# Altium PCB MainBoard.PcbDoc
Units mil, origin at the board's own origin, x right, y up, seen from the top; angles counter-clockwise.
Board outline 1003.94 x 925.2 mil, 2 copper layers (Top1, Bottom4), stack 46.457 mil thick; 29 components, 50 nets, 200 pads, 124 vias.
Unrouted connection lines stored in the file: 28.
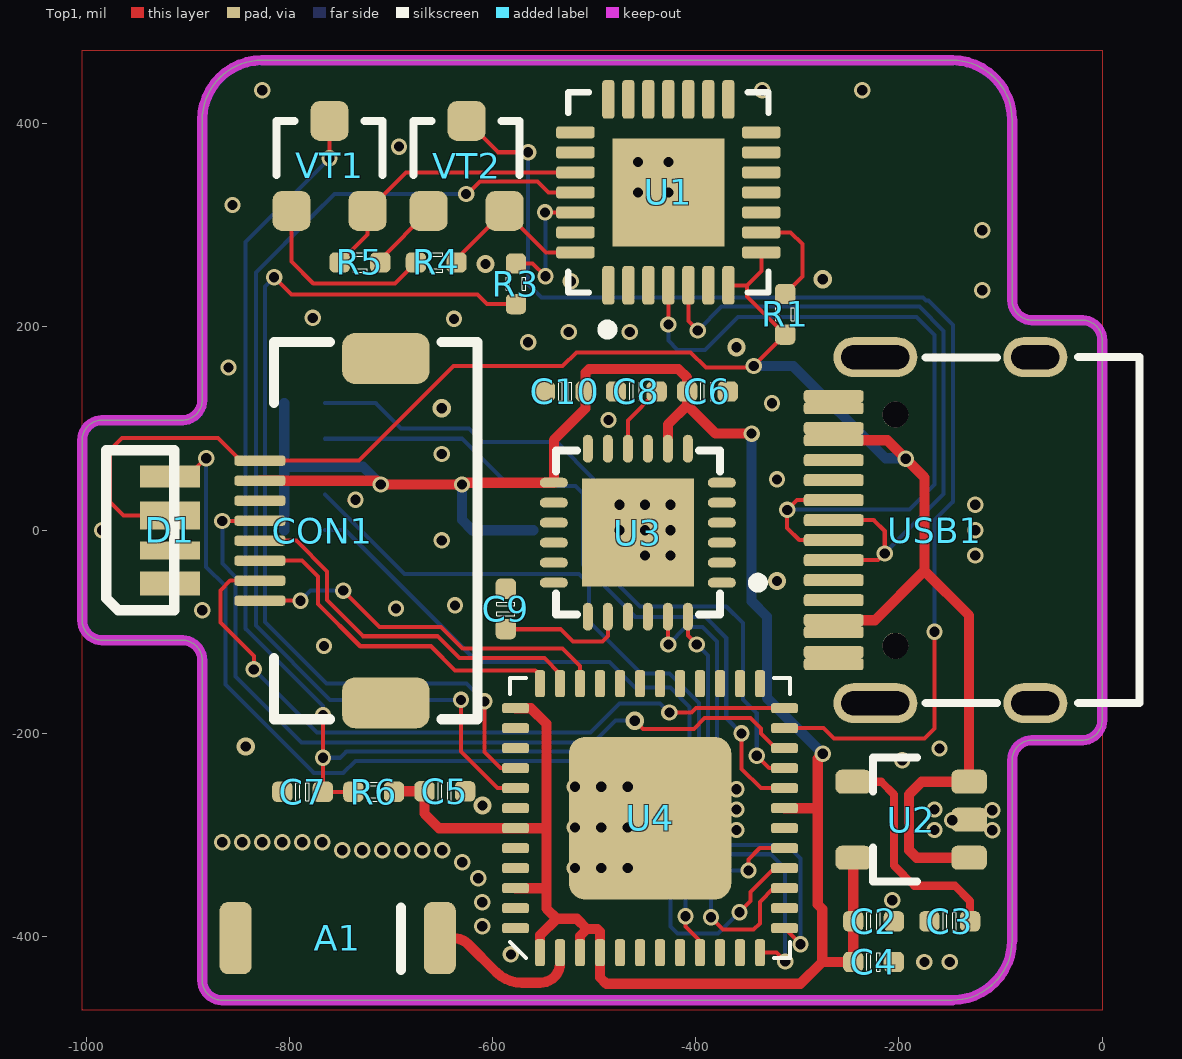
[diagram p0: Top1 view]
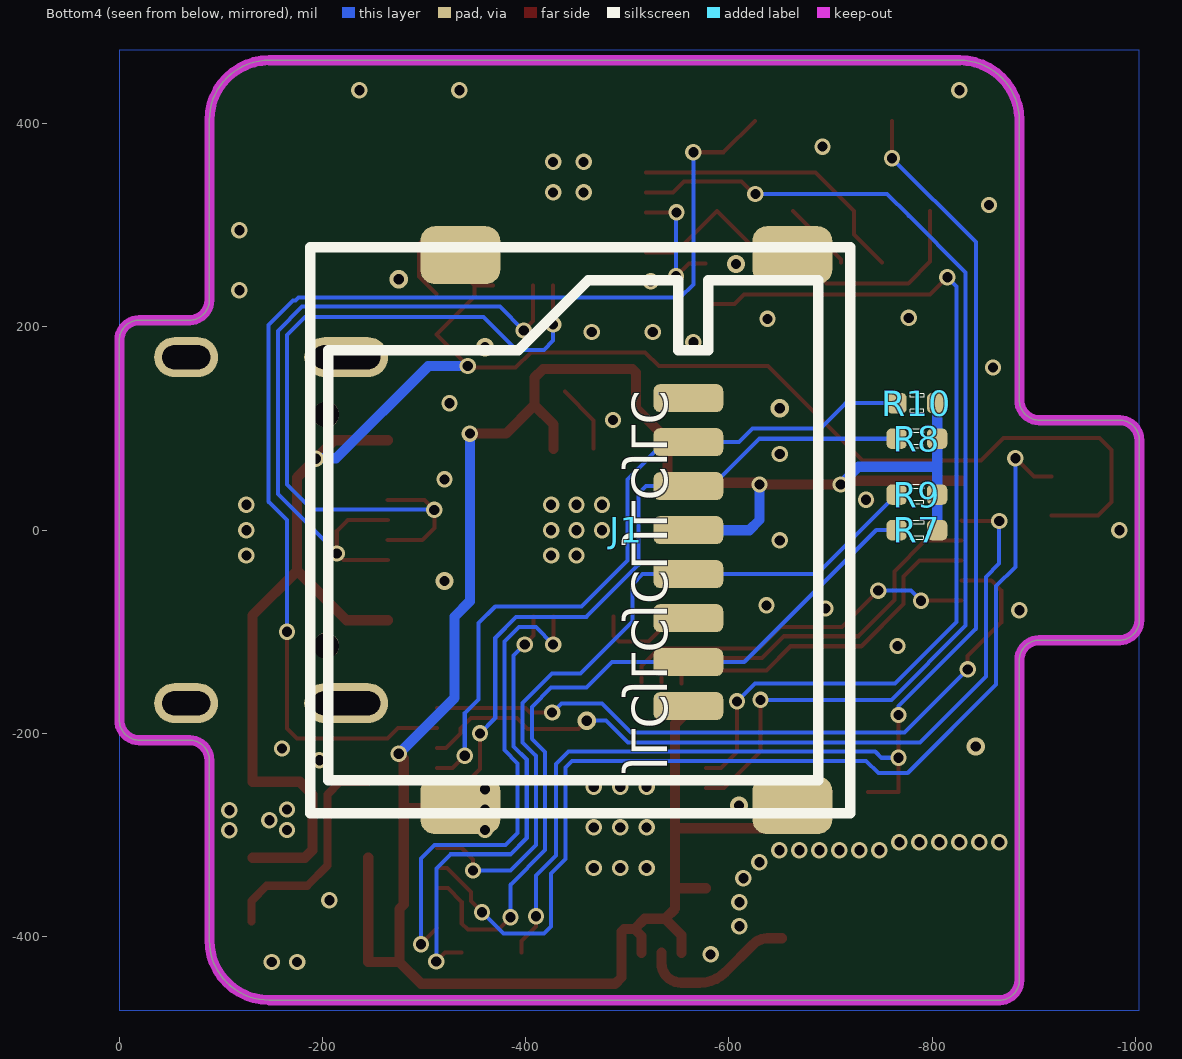
[diagram p1: Bottom4 view, seen from below]

## Layer stack, top to bottom
Top Solder: solder mask 0.3937, Solder Resist, Dk 3.5
Top1: signal copper 1.5748
Dielectric 2: core 43.3071, PP-006, Dk 4.2
Bottom4: signal copper 1.5748
Bottom Solder: solder mask 0.3937, Solder Resist, Dk 3.5

## Board outline
-905.51,-108.27 cw(c-905.51,-127.95) -885.83,-127.95 -885.83,-442.91 ccw(c-866.14,-442.91) -866.14,-462.6 -147.64,-462.6 ccw(c-147.64,-403.54) -88.58,-403.54 -88.58,-226.38 cw(c-68.9,-226.38) -68.9,-206.69 -19.68,-206.69 ccw(c-19.68,-187.01) 0,-187.01 0,187.01 ccw(c-19.68,187.01) -19.68,206.69 -68.9,206.69 cw(c-68.9,226.38) -88.58,226.38 -88.58,403.54 ccw(c-147.64,403.54) -147.64,462.6 -826.77,462.6 ccw(c-826.77,403.54) -885.83,403.54 -885.83,127.95 cw(c-905.51,127.95) -905.51,108.27 -984.25,108.27 ccw(c-984.25,88.58) -1003.94,88.58 -1003.94,-88.58 ccw(c-984.25,-88.58) -984.25,-108.27

## Design rules (kind name [scope] priority, off if disabled: settings)
AssemblyTestPointUsage [All] p0: scope1count=1 scope1_0_kind=Board scope1_0_value=Board scope2count=1 scope2_0_kind=Board scope2_0_value=Board commentlength=0
AssemblyTestpoint [All] p0: scope1count=1 scope1_0_kind=Board scope1_0_value=Board scope2count=1 scope2_0_kind=Board scope2_0_value=Board commentlength=0
Clearance [All] p0: scope1count=1 scope1_0_kind=Board scope1_0_value=Board scope2count=1 scope2_0_kind=Board scope2_0_value=Board commentlength=0 gap=5
Clearance [All] p1: gap=5 ignorepadtopadclearanceinfootprint=FALSE
ComponentClearance [All] p0: scope1count=1 scope1_0_kind=Board scope1_0_value=Board scope2count=1 scope2_0_kind=Board scope2_0_value=Board commentlength=0 gap=0 collisioncheckmode=3
ComponentClearance [All] p1: gap=0 collisioncheckmode=3 verticalgap=0 showdistances=FALSE
DiffPairsRouting [All] p0: scope1count=1 scope1_0_kind=Board scope1_0_value=Board scope2count=1 scope2_0_kind=Board scope2_0_value=Board commentlength=0
DiffPairsRouting [All] p1: maxlimit=9 minlimit=9 mostfreqgap=9 toplayer_minwidth=4 toplayer_maxwidth=4 toplayer_prefwidth=4 bottomlayer_minwidth=4 bottomlayer_maxwidth=4 bottomlayer_prefwidth=4 maxuncoupledlength=500
FabricationTestPointUsage [All] p0: scope1count=1 scope1_0_kind=Board scope1_0_value=Board scope2count=1 scope2_0_kind=Board scope2_0_value=Board commentlength=0 valid=0 allowmultiple=FALSE
FabricationTestpoint [All] p0: scope1count=1 scope1_0_kind=Board scope1_0_value=Board scope2count=1 scope2_0_kind=Board scope2_0_value=Board commentlength=0 side=3 testpointundercomponent=TRUE minsize=40 maxsize=100 preferedsize=60 minholesize=0 maxholesize=40 preferedholesize=32 testpointgrid=1
FanoutControl Fanout_BGA [All] p0: scope1count=1 scope1_0_kind=Board scope1_0_value=Board scope2count=1 scope2_0_kind=Board scope2_0_value=Board commentlength=26 // Fanout_BGA (Default Rule)
FanoutControl Fanout_LCC [All] p0 off: scope1count=1 scope1_0_kind=Board scope1_0_value=Board scope2count=1 scope2_0_kind=Board scope2_0_value=Board commentlength=69 // Protel DXP Scope 1 Expression Was: IsLCC   Fanout_LCC (Default Rule)
FanoutControl Fanout_SOIC [All] p0 off: scope1count=1 scope1_0_kind=Board scope1_0_value=Board scope2count=1 scope2_0_kind=Board scope2_0_value=Board commentlength=71 // Protel DXP Scope 1 Expression Was: IsSOIC   Fanout_SOIC (Default Rule)
FanoutControl Fanout_Small [All] p0 off: scope1count=1 scope1_0_kind=Board scope1_0_value=Board scope2count=1 scope2_0_kind=Board scope2_0_value=Board commentlength=84 // Protel DXP Scope 1 Expression Was: (CompPinCount < 5)   Fanout_Small (Default Rule)
FanoutControl Fanout_Default [All] p0: scope1count=1 scope1_0_kind=Board scope1_0_value=Board scope2count=1 scope2_0_kind=Board scope2_0_value=Board commentlength=30 // Fanout_Default (Default Rule)
FanoutControl Fanout_BGA [All] p1: bgadir=Out bgaviamode=Centered fanoutstyle=Auto fanoutdirection=Alternating viagrid=1 // Fanout_BGA (Default Rule)
Height [All] p0: scope1count=1 scope1_0_kind=Board scope1_0_value=Board scope2count=1 scope2_0_kind=Board scope2_0_value=Board commentlength=0
HoleSize [All] p0: scope1count=1 scope1_0_kind=Board scope1_0_value=Board scope2count=1 scope2_0_kind=Board scope2_0_value=Board commentlength=0 absolutevalues=TRUE maxlimit=10000 minlimit=8 maxpercent=80.000 minpercent=20.000
HoleSize [All] p1: absolutevalues=TRUE maxlimit=10000 minlimit=8 maxpercent=80.000 minpercent=20.000
HoleToHoleClearance [All] p0: scope1count=1 scope1_0_kind=Board scope1_0_value=Board scope2count=1 scope2_0_kind=Board scope2_0_value=Board commentlength=0
LayerPairs [All] p0: scope1count=1 scope1_0_kind=Board scope1_0_value=Board scope2count=1 scope2_0_kind=Board scope2_0_value=Board commentlength=0 enforce=TRUE
MinimumSolderMaskSliver [All] p0 off: scope1count=1 scope1_0_kind=Board scope1_0_value=Board scope2count=1 scope2_0_kind=Board scope2_0_value=Board commentlength=0
MinimumSolderMaskSliver [All] p1 off: minsoldermaskwidth=2
NetAntennae [All] p0: scope1count=1 scope1_0_kind=Board scope1_0_value=Board scope2count=1 scope2_0_kind=Board scope2_0_value=Board commentlength=0
PasteMaskExpansion [All] p0: scope1count=1 scope1_0_kind=Board scope1_0_value=Board scope2count=1 scope2_0_kind=Board scope2_0_value=Board commentlength=0 expansion=0
PlaneClearance [All] p0: scope1count=1 scope1_0_kind=Board scope1_0_value=Board scope2count=1 scope2_0_kind=Board scope2_0_value=Board commentlength=0 clearance=8
PlaneClearance [All] p1: clearance=8
PlaneConnect [All] p0: scope1count=1 scope1_0_kind=Board scope1_0_value=Board scope2count=1 scope2_0_kind=Board scope2_0_value=Board commentlength=0 planeconnectstyle=Direct reliefexpansion=20 reliefentries=4 reliefconductorwidth=10 reliefairgap=10
PlaneConnect [All] p1: planeconnectstyle=Direct reliefexpansion=20 reliefentries=4 reliefconductorwidth=10 reliefairgap=10
PolygonConnect [All] p0: scope1count=1 scope1_0_kind=Board scope1_0_value=Board scope2count=1 scope2_0_kind=Board scope2_0_value=Board commentlength=0 connectstyle=Direct reliefconductorwidth=10 reliefentries=4 polygonreliefangle="90 Angle"
PolygonConnect [All] p1: connectstyle=Direct reliefconductorwidth=10 reliefentries=4 polygonreliefangle="90 Angle" airgapwidth=10
RoutingCorners [All] p0: scope1count=1 scope1_0_kind=Board scope1_0_value=Board scope2count=1 scope2_0_kind=Board scope2_0_value=Board commentlength=0 cornerstyle=45-Degree minsetback=100 maxsetback=100
RoutingLayers [All] p0: scope1count=1 scope1_0_kind=Board scope1_0_value=Board scope2count=1 scope2_0_kind=Board scope2_0_value=Board commentlength=0 top layer=Automatic bottom layer=Automatic
RoutingPriority [All] p0: scope1count=1 scope1_0_kind=Board scope1_0_value=Board scope2count=1 scope2_0_kind=Board scope2_0_value=Board commentlength=0
RoutingTopology [All] p0: scope1count=1 scope1_0_kind=Board scope1_0_value=Board scope2count=1 scope2_0_kind=Board scope2_0_value=Board commentlength=0 topology=Shortest
RoutingVias [All] p0: scope1count=1 scope1_0_kind=Board scope1_0_value=Board scope2count=1 scope2_0_kind=Board scope2_0_value=Board commentlength=0 holewidth=8 width=16 viastyle="Through Hole" minholewidth=6 minwidth=12 maxholewidth=28 maxwidth=50
RoutingVias [All] p1: holewidth=8 width=16 viastyle="Through Hole" minholewidth=6 minwidth=12 maxholewidth=28 maxwidth=50
ShortCircuit [All] p0: scope1count=1 scope1_0_kind=Board scope1_0_value=Board scope2count=1 scope2_0_kind=Board scope2_0_value=Board commentlength=0 allowed=FALSE
SilkToBoardRegionClearance [All] p0 off: scope1count=1 scope1_0_kind=Board scope1_0_value=Board scope2count=1 scope2_0_kind=Board scope2_0_value=Board commentlength=0
SilkToBoardRegionClearance [All] p1 off:
SilkToSilkClearance [All] p0: scope1count=1 scope1_0_kind=Board scope1_0_value=Board scope2count=1 scope2_0_kind=Board scope2_0_value=Board commentlength=0
SilkToSilkClearance [All] p1: silktosilkclearance=0
SilkToSolderMaskClearance [All] p0 off: scope1count=1 scope1_0_kind=Board scope1_0_value=Board scope2count=1 scope2_0_kind=Board scope2_0_value=Board commentlength=44 // Protel DXP Scope 1 Expression Was: IsPad
SilkToSolderMaskClearance [IsPad] p1: minsilkscreentomaskgap=0 clearancetoexposedcopper=TRUE
SolderMaskExpansion [All] p0: scope1count=1 scope1_0_kind=Board scope1_0_value=Board scope2count=1 scope2_0_kind=Board scope2_0_value=Board commentlength=0 expansion=3
SolderMaskExpansion [All] p1: expansion=3 istentingtop=FALSE
UnRoutedNet [All] p0: scope1count=1 scope1_0_kind=Board scope1_0_value=Board scope2count=1 scope2_0_kind=Board scope2_0_value=Board commentlength=0
UnpouredPolygon [All] p0: scope1count=1 scope1_0_kind=Board scope1_0_value=Board scope2count=1 scope2_0_kind=Board scope2_0_value=Board commentlength=0
Width [All] p0: scope1count=1 scope1_0_kind=Board scope1_0_value=Board scope2count=1 scope2_0_kind=Board scope2_0_value=Board commentlength=0 maxlimit=10000 minlimit=4 preferedwidth=4
Width [All] p1: maxlimit=10000 minlimit=4 preferedwidth=4
20 further rules are at their usual default settings.

## Components (designator, comment, footprint, x,y, rotation, side; value= is the part's Value field where it differs from the comment)
A1 "" ANT-Rainsun-AN5120 -751.97,-401.57 r180 top
C2 "10uF" CAP_0402 -225,-385 r180 top
C3 "10nF" CAP_0402 -150,-385 r0 top
C4 "10uF" CAP_0402 -225,-425 r180 top
C5 "0.1uF" CAP_0402 -647,-257 r180 top
C6 "10nF" CAP_0402 -388.5,136.5 r0 top
C7 "0.1uF" CAP_0402 -787,-257.5 r180 top
C8 "0.1uF" CAP_0402 -458.5,136.5 r180 top
C9 "2.2nF" CAP_0402 -587,-77.5 r270 top
C10 "0.1uF" CAP_0402 -528.5,136.5 r0 top
CON1 "FFC_0.5_8" FFC_0.5_8 -740,-0.5 r90 top
D1 "RGB" LED_WS2812_CE -925.2,0 r270 top
J1 "TF-Socket" TF_F -560,0 r90 bottom locked
R1 "10K" RES_0402 -312,212.5 r90 top
R3 "200R" RES_0402 -577,242.5 r90 top
R4 "12K" RES_0402 -655.5,263.5 r180 top
R5 "12K" RES_0402 -730.5,263.5 r0 top
R6 "10K" RES_0402 -717,-257.5 r180 top
R7 "10K" RES_0402 -785,0 r0 bottom
R8 "10K" RES_0402 -785,90 r0 bottom
R9 "10K" RES_0402 -785,35 r0 bottom
R10 "10K" RES_0402 -785,125 r0 bottom
U1 "CP2102" QFN-28 -427,332.5 r90 top
U2 "LP2992 3V3" SOT23-5 -190,-285 r180 top
U3 "MPU6050" QFN-24 -457,-2.5 r180 top
U4 "ESP32_SIP" QFN-48_7X7 -445,-283.5 r90 top locked
USB1 "Type-C" Type-C-TOP -165,0 r0 top
VT1 "S8050" SMT_TRIODE_NPN -760.5,358.5 r0 top
VT2 "S8050" SMT_TRIODE_NPN -625.5,358.5 r0 top

## Footprints (in the part's own frame and the unit in brackets; to place one, negate y for a bottom-side part, rotate by r counter-clockwise, add the part's x,y. Pads: shape width x height; smd on the part's side, far side on the other; paste and mask are expansions set on the pad)
ANT-Rainsun-AN5120 [mm] "选择焊盘"
  rrect50% 0.8x1.8 smd: 1(-2.54,0) ""(2.563,0)
  silkscreen extent -1.57,-0.76 -1.57,0.79
CAP_0402 [mil]
  rrect50% 20x20 smd: 1(-20,0) 2(20,0)
  silkscreen extent -7,-9 7,9
FFC_0.5_8 [mil]
  rrect50% 50x86 smd: 0(-169.5,-35) 0(169.5,-35)
  rrect50% 10x50 smd: 1(-68.9,89) 2(-49.21,89) 3(-29.53,89) 4(-9.84,89) 5(9.84,89) 6(29.53,89) 7(49.21,89) 8(68.9,89)
  silkscreen extent -186,-125 186,75
LED_WS2812_CE [mm]
  rect 0.55x1.5 smd: 1(-1.338,0.2)
  rect 0.7x1.5 smd: 2(-0.363,0.2)
  rect 0.45x1.5 smd: 3(0.512,0.2)
  rect 0.6x1.5 smd: 4(1.337,0.2)
  silkscreen extent -2,-1.4 2,0.3
QFN-24 [mm] "QFN, 24-Leads, Body 4.1x4.1mm (max), Pitch 0.50mm, IPC Low Density"
  oval 0.7x0.25 smd: 1(-2.1,1.25) 2(-2.1,0.75) 3(-2.1,0.25) 4(-2.1,-0.25) 5(-2.1,-0.75) 6(-2.1,-1.25) 13(2.1,-1.25) 14(2.1,-0.75) 15(2.1,-0.25) 16(2.1,0.25) 17(2.1,0.75) 18(2.1,1.25)
  oval 0.25x0.7 smd: 7(-1.25,-2.1) 8(-0.75,-2.1) 9(-0.25,-2.1) 10(0.25,-2.1) 11(0.75,-2.1) 12(1.25,-2.1) 19(1.25,2.1) 20(0.75,2.1) 21(0.25,2.1) 22(-0.25,2.1) 23(-0.75,2.1) 24(-1.25,2.1)
  rect 2.8x2.7 smd: ""(0,0)
  silkscreen extent -3.13,-2.05 2.05,2.05
QFN-28 [mil]
  rrect50% 38x12 smd mask+0: 1(-91.5,59.06) 2(-91.5,39.37) 3(-91.5,19.68) 4(-91.5,0) 5(-91.5,-19.69) 6(-91.5,-39.37) 7(-91.5,-59.06) 15(91.5,-59.06) 16(91.5,-39.37) 17(91.5,-19.69) 18(91.5,0) 19(91.5,19.68) 20(91.5,39.37) 21(91.5,59.06)
  rrect50% 12x38 smd mask+0: 8(-59.06,-91.5) 9(-39.37,-91.5) 10(-19.68,-91.5) 11(0,-91.5) 12(19.69,-91.5) 13(39.37,-91.5) 14(59.06,-91.5) 22(59.06,91.5) 23(39.37,91.5) 24(19.69,91.5) 25(0,91.5) 26(-19.68,91.5) 27(-39.37,91.5) 28(-59.06,91.5)
  rect 106.3x110.24 smd: 29(0,0)
  silkscreen extent -140,-98 98,98
QFN-48_7X7 [mm]
  rrect20% 4.064x4.064 smd: 0(0,0)
  rrect50% 0.675x0.25 smd: 1(-3.363,2.75) 2(-3.363,2.25) 3(-3.363,1.75) 4(-3.363,1.25) 5(-3.363,0.75) 6(-3.363,0.25) 7(-3.363,-0.25) 8(-3.363,-0.75) 9(-3.363,-1.25) 10(-3.363,-1.75) 11(-3.363,-2.25) 12(-3.363,-2.75) 25(3.363,-2.75) 26(3.363,-2.25) 27(3.363,-1.75) 28(3.363,-1.25) 29(3.363,-0.75) 30(3.363,-0.25) 31(3.363,0.25) 32(3.363,0.75) 33(3.363,1.25) 34(3.363,1.75) 35(3.363,2.25) 36(3.363,2.75)
  rrect50% 0.25x0.675 smd: 13(-2.75,-3.363) 14(-2.25,-3.363) 15(-1.75,-3.363) 16(-1.25,-3.363) 17(-0.75,-3.363) 18(-0.25,-3.363) 19(0.25,-3.363) 20(0.75,-3.363) 21(1.25,-3.363) 22(1.75,-3.363) 23(2.25,-3.363) 24(2.75,-3.363) 37(2.75,3.363) 38(2.25,3.363) 39(1.75,3.363) 40(1.25,3.363) 41(0.75,3.363) 42(0.25,3.363) 43(-0.25,3.363) 44(-0.75,3.363) 45(-1.25,3.363) 46(-1.75,3.363) 47(-2.25,3.363) 48(-2.75,3.363)
  silkscreen extent -3.5,-3.5 3.5,3.5
RES_0402 [mil]
  rrect50% 20x20 smd: 1(-20,0) 2(20,0)
  silkscreen extent -7,-10 7,10
SMT_TRIODE_NPN [mm] "Surface mount NPN transistor, package SOT-23"
  rrect50% 0.95x1 smd: 1(-0.95,-1.125) 2(0.95,-1.125) 3(0,1.125)
  silkscreen extent -1.33,-0.22 1.32,1.13
SOT23-5 [mm] "SOT23, 3-Leads, Body 3.1x3.0mm (max), Pitch 0.95mm, IPC Medium Density"
  rrect50% 0.889x0.6 smd: 1(-1.5,0.95) 2(-1.5,0) 3(-1.5,-0.95) 4(1.396,-0.95) 5(1.396,0.95)
  silkscreen extent -0.2,-1.55 0.9,1.55
TF_F [mm]
  rrect50% 1.45x2 smd: 0(-6.875,-2.6) 0(-6.875,5.7) 0(6.875,-2.6) 0(6.875,5.7)
  rrect50% 0.7x1.75 smd: 1(3.3,0) 2(2.2,0) 3(1.1,0) 4(0,0) 5(-1.1,0) 6(-2.2,0) 7(-3.3,0) 8(-4.4,0)
  silkscreen extent -7.08,-4.05 7.08,9.45
Type-C-TOP [mm]
  round 0.65 hole 0.65: 0(-0.98,-2.89) 0(-0.98,2.89)
  oval 1.6x1 hole 0.6 slot 1.2 at 0 deg: 1(2.52,4.325) 2(2.52,-4.325)
  oval 2.1x1 hole 0.6 slot 1.7 at 0 deg: 3(-1.48,-4.325) 4(-1.48,4.325)
  rrect50% 1.5x0.3 smd: A1(-2.52,-3.35) A4(-2.52,-2.55) A5(-2.52,-1.25) A6(-2.52,-0.25) A7(-2.52,0.25) A8(-2.52,1.25) A9(-2.52,2.55) A12(-2.52,3.35) B1(-2.52,3.05) B4(-2.52,2.25) B5(-2.52,1.75) B6(-2.52,0.75) B7(-2.52,-0.75) B8(-2.52,-1.75) B9(-2.52,-2.25) B12(-2.52,-3.05)
  silkscreen extent -0.22,-4.33 5.12,4.33

## Part data
A1: library part ANT-Rainsun-AP5120
C2 C3 C4 C5 C6 C7 C8 C9 C10: library part 电容-0402, "Capacitor"
CON1: "FFC"
D1: library part LED_5050_WS2812B, "LED"
J1: "10 _8 + 2_ Position Card Connector Secure Digital - microSDa?￠ Surface Mount, Right Angle Gold"
R1 R3 R4 R5 R6 R7 R8 R9 R10: library part 电阻-0402, "Resistor"
U1: "USBתTTL"
U2: library part LP2992, "LDO"
U3: "六轴传感器"
U4: library part ESP32-PICO
USB1: library part USB-Type-C-TOP
VT1 VT2: library part SMT_TRIODE_NPN, "Surface mount NPN transistor, package SOT-23"

## Via types
v1: diameter 16, hole 10, Top1 to Bottom4, tented both sides, 116 vias
v2: diameter 18, hole 10, Top1 to Bottom4, tented both sides, 8 vias

## Nets (pads, with @x,y where several pads share a name; then routed paths per layer and width w, separated by ;. In a path a pad name is that pad's centre, name@x,y a point inside that pad or via, vN(x,y) a via of type N, cw(c..) or ccw(c..) an arc to the next point about the centre after c; other vN are vias at no path point)
3V3: C2.2 C4.2 C5.2 C6.1 C10.2 CON1.7 J1.4 R6.1 R7.1 R8.1 R9.1 R10.1 U2.5 U3.8 U3.13 U4.1 U4.3 U4.4 U4.19 U4.37 U4.43 U4.46 | length 2554.8
  Top1 w10: CON1.7 -713.71,48.71 v1(-710,45) ; v1@-708.14,46.86 -706.29,45 v1(-630,45) ; R6.1 -696.5,-257 C5.2 -667,-279 -652.66,-293.34 U4.43 -547,-293.34 ; v1@-630,46.71 U3.13 -539.68,88.82 -508.5,120 C10.2 -508.5,155 -505,158.5 -417,158.5 -408.5,150 C6.1 -408.5,123 ; U4.46 -547,-352.4 ; U4.37 -562.27,-175.23 -547,-190.5 -547,-293.34 ; U4.1 -553.27,-398.77 -537,-382.5 ; U4.3 -513.9,-399.4 -507,-392.5 ; U3.8 -427.47,104.03 -408.5,123 ; v1(-345,95) -380.5,95 -408.5,123 ; U4.19 -280,-273.66 ; v1(-275,-220) -280,-225 -280,-273.66 ; U2.5 C2.2 C2.2 C4.2 -275.59,-425 ; -547,-352.4 -547,-372.5 -537,-382.5 ; -547,-352.4 -547,-293.34 ; -537,-382.5 -517,-382.5 -507,-392.5 ; -507,-392.5 -497,-392.5 -494.21,-395.29 U4.4 -494.21,-440.29 -488,-446.5 -297.09,-446.5 -275.59,-425 ; -280,-273.66 -280,-368.5 -275.59,-372.91 -275.59,-425
  Bottom4 w10: R7.1 R9.1 -805,62.5 ; R10.1 R8.1 -805,62.5 ; v1(-710,45) -727.5,62.5 -805,62.5 ; v1(-630,45) -630,10 -620,0 J1.4 ; v1(-345,95) -345,-70 -330,-85 -330,-165 v1(-275,-220)
BH_SCL: U3.23 U4.13 | length 494.3
  Top1 w4: U3.23 -427.47,-112.03 v1(-427,-112.5) ; U4.13 v1(-296.89,-407.5)
  Bottom4 w4: v1(-427,-112.5) -410,-95.5 -393.23,-95.5 -379,-109.73 -379,-216.5 -392,-229.5 -392,-298 -380,-310 -310,-310 -297,-323 -297,-407.39 v1(-296.89,-407.5)
BH_SDA: U3.24 U4.12 | length 452.6
  Top1 w4: U3.24 -407.79,-103.71 v1(-399,-112.5) ; U4.12 -320.62,-415.88 v1(-312,-424.5)
  Bottom4 w4: v1(-399,-112.5) -388.11,-123.39 -388.11,-166.16 -388,-166.27 -388,-212.77 -401,-225.77 -401,-303 -385,-319 -326,-319 -312,-333 -312,-396 v1(-312,-424.5)
CP_Rx: U1.25 U4.41 | length 1057.4
  Top1 w4: v1(-631,-167) -631,-217.97 -595,-253.97 U4.41 ; v1(-626,331) -626,329.5 -612.31,343.19 -555.68,343.19 -545,332.5 U1.25
  Bottom4 w4: v1(-631,-167) -760,-167 -833,-94 -833,253.5 -777,309.5 -755.5,331 v1(-626,331)
CP_Tx: R3.1 U4.40 | length 927.5
  Top1 w4: v1(-815,249) -798,232 -615,232 -605.5,222.5 R3.1 ; v1(-608,-168.5) -608,-218.5 -592.21,-234.29 U4.40
  Bottom4 w4: v1(-815,249) -824,240 -824,-90.27 -763.27,-151 -625.5,-151 v1(-608,-168.5)
DC: CON1.5 U4.22 | length 794.6
  Top1 w4: v1(-866,9) -829.34,9 CON1.5 ; v2(-460,-187.5) -452,-195.5 -401.75,-195.5 -391.25,-185 -346,-185 -336,-195 -336,-200 -321.4,-214.6 U4.22
  Bottom4 w4: v1(-866,9) -866,-33 -853,-46 -853,-144 -788,-209 -500.5,-209 -479,-187.5 v2(-460,-187.5)
DTR: R4.1 U1.28 VT2.2 | length 156.8
  Top1 w4: R4.1 -635.5,266.81 VT2.2 -547.33,273.44 U1.28
EN: C7.1 R6.2 U4.9 VT1.3 | length 1300.5
  Top1 w4: v1(-767,-182) C7.1 R6.2 ; v1(-760.5,366) VT1.3 ; v1(-410,-380) -410,-390 -395.79,-404.21 U4.9
  Bottom4 w4: v1(-767,-224) -750,-224 -744,-218 -442,-218 -430,-230 -430,-320 -410,-340 v1(-410,-380) ; v1(-767,-182) -767,-173 -843,-97 -843,283.5 v1(-760.5,366)
FLASH_CLK: U4.31
FLASH_CS: U4.25
FLASH_SD0: U4.27
FLASH_SD1: U4.33
FLASH_SD2: U4.30
FLASH_SD3: U4.32
GND: C2.1 C3.1 C4.1 C5.1 C6.2 C7.2 C8.2 C9.1 C10.1 CON1.0 CON1.6 D1.4 J1.0 J1.6 U1.3 U1.29 U2.2 U3. U3.1 U3.9 U3.11 U3.18 U4.0 USB1.1 USB1.2 USB1.3 USB1.4 USB1.A1 USB1.A12 USB1.B1 USB1.B12 | length 4.4
  Top1 w8: v1@-739.03,29.03 -738.05,30 v1(-735,30)
  other v1: -175,-425 -150,-425 -582,-417.5 -610.24,-389.76 -610.24,-366.14 -206.69,-364.17 -614.17,-342.52 -519,-332.5 -493,-332.5 -467,-332.5 -629.92,-326.77 -748.03,-314.96 -728.35,-314.96 -708.66,-314.96 -688.98,-314.96 -669.29,-314.96 -649.61,-314.96 -866.14,-307.09 -846.46,-307.09 -826.77,-307.09 -807.09,-307.09 -787.4,-307.09 -767.72,-307.09 -360,-295 -165,-295 -108.27,-295.28 -519,-292.5 -493,-292.5 -467,-292.5 -147.64,-285.43 -360,-275 -165,-275 -108.27,-275.59 -360,-255 -519,-252.5 -493,-252.5 -467,-252.5 -196.85,-226.38 -160,-215 -766,-114 -885.83,-78.74 -695,-77 -637,-74 -450,-25 -425,-25 -125,-25 -650,-10 -984.25,0 -475,0 -450,0 -425,0 -125,0 -475,25 -450,25 -425,25 -125,25 -320,50 -650,75 -486,108.5 -325,125 -860,160 -565,185 -525,195 -465,195 -638,208 -777,209 -118.11,236.22 -523,245 -118.11,295.28 -856,320 -457,332.5 -427,332.5 -457,362.5 -427,362.5 -692,377.5 -826.77,433.07 -334.65,433.07 -236.22,433.07
  other v2: -610,-271 -843,-213 -320,-50 -650,120 -360,180 -275,247 -607,262
GPIO0: U4.23 VT2.3 | length 1198.2
  Top1 w4: VT2.3 -594.71,372 v1(-565,372) ; U4.23 -274.08,-194.92 -264,-205 -175,-205 -165,-195 v1(-165,-100)
  Bottom4 w4: v1(-565,372) -565,242 -552,229 -176.27,229 -173.27,226 -171,226 -147,202 -147,28 -165,10 v1(-165,-100)
GPIO4: CON1.2 U4.24 | length 699.6
  Top1 w4: v1(-835,-137) -835,-124 -868,-91 -868,-59.5 -858.21,-49.71 CON1.2 ; v1(-426,-179.5) -404,-179.5 -399.73,-175.23 U4.24
  Bottom4 w4: v1(-835,-137) -773,-199 -503.5,-199 -475,-170.5 -435,-170.5 v1(-426,-179.5)
GPIO5: CON1.1 U4.34 | length 367.4
  Top1 w4: CON1.1 v1(-789.1,-69.4) ; v1(-747,-59.5) -711.25,-95.25 -650.75,-95.25 -629.5,-116.5 -531,-116.5 -513.9,-133.6 U4.34
  Bottom4 w4: v1(-789.1,-69.4) -779.2,-59.5 v1(-747,-59.5)
GPIO9: U4.28
GPIO10: U4.29
GPIO12: U4.18
GPIO13: J1.3 R8.2 U4.20 | length 702.9
  Top1 w4: v1(-355,-200) -355,-234.97 -336,-253.97 U4.20
  Bottom4 w4: R8.2 -630,90 -583.31,43.31 J1.3 -518.31,43.31 -511,36 -511,-34 -460,-85 -460,-85.5 -390.5,-85.5 -370,-106 -370,-185 v1(-355,-200)
GPIO14: J1.5 R9.2 U4.17 | length 743.1
  Top1 w4: v1(-348,-335) -348,-324 -337.03,-313.03 U4.17
  Bottom4 w4: R9.2 -686.69,-43.31 J1.5 -515,-43.31 -505,-53.31 -505,-90 -454,-141 -426,-141 -397,-170 -397,-209.04 -410,-222.04 -410,-310 -385,-335 v1(-348,-335)
GPIO15: J1.2 R10.2 U4.21 | length 716.6
  Top1 w4: v1(-340,-222) -327.71,-234.29 U4.21
  Bottom4 w4: R10.2 -715,125 -690,100 -623.39,100 -610,86.61 J1.2 -536.61,86.61 -500,50 -500,-30 -455,-75 -370,-75 -353.5,-91.5 -353.5,-166.5 -340,-180 v1(-340,-222)
GPIO18: CON1.4 U4.35 | length 376
  Top1 w4: CON1.4 -793.16,-10.34 -763,-40.5 -763,-68.77 -727.39,-104.39 -654.34,-104.39 -632.73,-126 -549,-126 -533.58,-141.42 U4.35
GPIO19: U4.38
GPIO21: U4.42
GPIO22: U4.39
GPIO23: CON1.3 U4.36 | length 346.5
  Top1 w4: CON1.3 -787.72,-30.03 -772,-45.75 -772,-72.5 -730.25,-114.25 -660.75,-114.25 -637,-138 -558,-138 -553.27,-142.73 U4.36
GPIO25: U4.14
GPIO26: J1.7 R7.2 U4.15 | length 764
  Top1 w4: v1(-385,-381) -373,-393 -343,-393 -337,-387 -337,-366 -323.4,-352.4 U4.15
  Bottom4 w4: R7.2 -745,0 -615.08,-129.92 J1.7 -485.08,-129.92 -460,-155 -425,-155 -406,-174 -406,-205.32 -419,-218.32 -419,-315 -385,-349 v1(-385,-381)
GPIO27: D1.1 U4.16 | length 1050.7
  Top1 w4: D1.1 -900.1,52.66 v1(-881.89,70.87) ; v1(-357,-376) -346,-365 -346,-356 -322.71,-332.71 U4.16
  Bottom4 w4: v1(-881.89,70.87) -881.89,-36.11 -863,-55 -863,-152 -776,-239 -747,-239 -735,-227 -445.73,-227 -439,-233.73 -439,-323.73 -425,-337.73 -425,-390 -418,-397 -378,-397 v1(-357,-376)
GPIO34: U4.10
GPIO35: U4.11
GPIO37: U4.6
GPIO38: U4.7
NetA1_1: A1.1 U4.2 | length 155.4
  Top1 w10: A1.1 -638.27,-401.57 cw(c-638.27,-421.74) -624.02,-407.48 -596.69,-434.8 ; -596.68,-434.82 ccw(c-570.87,-408.97) -570.87,-445.5 -553.49,-445.5 ccw(c-553.49,-425.01) -539,-439.5 ccw(c-552.08,-426.42) -533.58,-426.42 U4.2
NetC3_2: C3.2 U2.4 | length 224.6
  Top1 w8: U2.4 -217.4,-247.6 -205,-260 -205,-330 -185,-350 -145,-350 -130,-365 C3.2
NetC8_1: C8.1 U3.10 | length 68.1
  Top1 w4: U3.10 -466.84,108.16 C8.1
NetC9_2: C9.2 U3.20 | length 126.6
  Top1 w4: C9.2 -533,-97.5 -521,-109.5 -492,-109.5 -486.53,-104.03 U3.20
NetR1_2: R1.2 U1.9 | length 101.4
  Top1 w4: U1.9 -306.63,293.13 -295,281.5 -295,249.5 R1.2
NetR3_2: R3.2 U1.26 | length 126.9
  Top1 w4: R3.2 -560.5,262.5 v1(-548,250) ; v1(-548.31,312.82) U1.26
  Bottom4 w4: v1(-548.31,312.82) -548,312.5 v1(-548,250)
NetR4_2: R4.2 VT1.1 | length 189.6
  Top1 w4: VT1.1 -797.9,264.4 -776.5,243 -696,243 R4.2
NetR5_2: R5.2 VT2.1 | length 70.4
  Top1 w4: R5.2 -710.5,266.61 VT2.1
RTS: R5.1 U1.24 VT1.2 | length 282.4
  Top1 w4: R5.1 -723.1,290.9 VT1.2 -685.12,352.19 U1.24
SENSOR_VN: U4.8
SENSOR_VP: U4.5
USB-PWR-DM: U1.5 USB1.A7 USB1.B7 | length 682.2
  Top1 w4: U1.5 -407.31,205.82 v1(-398,196.5) ; USB1.B7 -220.53,-29.53 v1(-214,-23) -214,-1 -224.84,9.84 USB1.A7
  Bottom4 w4: v1(-398,196.5) -374.5,220 -180,220 -156,196 -156,35.5 -192,-0.5 v1@-214,-22.5
USB-PWR-DP: U1.4 USB1.A6 USB1.B6 | length 761.9
  Top1 w4: v1(-427,202.5) U1.4 ; USB1.A6 -298.16,-9.84 -310.01,2.01 v1(-310.01,19.99) -300.47,29.53 USB1.B6
  Bottom4 w4: v1(-427,202.5) -427,186.5 -418,177.5 -391,177.5 -358.5,210 -182.73,210 -165,192.27 -165,45 -189.51,20.49 v1@-310.01,20.49
VDD_5V: CON1.8 D1.2 R1.1 U1.7 U1.8 U2.1 U2.3 USB1.A4 USB1.A9 USB1.B4 USB1.B9 | length 1878.9
  Top1 w4: D1.2 -963.09,14.27 -976.38,27.56 -976.38,78.74 -964.57,90.55 -870.08,90.55 -847.92,68.4 CON1.8 -731.6,68.4 -638.5,161.5 -531,161.5 -517.5,175 -405,175 -390,160 -344.5,160 v1(-343,161.5) R1.1 -349.5,230 -349.5,241 ; U1.7 -349.5,241 ; U1.8 -335.5,255 -349.5,241
  Top1 w10: USB1.B9 -223.58,-88.58 -175,-40 ; USB1.B4 -211.58,88.58 v1(-193.29,70.29) -175,52 -175,-40 ; U2.1 -182.6,-322.4 -190,-315 -190,-260 -177.6,-247.6 U2.3 -130.94,-84.06 -175,-40
  Bottom4 w10: v1(-343,161.5) -304,161.5 -213.29,70.79 v1@-193.29,70.79
pads on no net: A1. D1.3 J1.1 J1.8 U1.1 U1.2 U1.6 U1.10 U1.11 U1.12 U1.13 U1.14 U1.15 U1.16 U1.17 U1.18 U1.19 U1.20 U1.21 U1.22 U1.23 U1.27 U3.2 U3.3 U3.4 U3.5 U3.6 U3.7 U3.12 U3.14 U3.15 U3.16 U3.17 U3.19 U3.21 U3.22 U4.26 U4.44 U4.45 U4.47 U4.48 USB1.0 USB1.A5 USB1.A8 USB1.B5 USB1.B8

## Polygon pours and split planes (outlines as drawn)
GND on Bottom4 "GND" (solid, remove dead copper, pour order 0): -1003.94,472.44 0,472.44 0,-472.44 -1003.94,-472.44
GND on Top1 "GND" (solid, remove dead copper, pour order 1): -1003.94,472.44 0,472.44 0,-472.44 -1003.94,-472.44
GND on Top1 "GND" (solid, remove dead copper, pour order 2): -1338.58,-196.85

## Keep-outs
Keep-Out Layer:
  the board outline again, w10

## Silkscreen, mask and mechanical layers (free items; w line width, h text height)
Bottom Overlay:
  text "JLCJLCJCLJLCJLC" at -492.61,-236.93 h60 r90
Bottom Solder:
  drawing of 667 lines, arcs and shapes, not listed
  text "PCB Designed by Misaka" at -384.43,408.57 h60
Mechanical 1:
  the board outline again, w10

## Text inside footprints (layer, text, board x,y; h text height)
C10: Mechanical 13 "RAINSUN" at -780.47,-610.07 h60